# Altium PCB JacdacKeycapButtonBc30 135 panel.PcbDoc
Units mm, origin at the board's own origin, x right, y up, seen from the top; angles counter-clockwise.
Board outline 70 x 74 mm, 2 copper layers (Top Layer, Bottom Layer), stack 1.525 mm thick; 4 components, 10 nets, 4 pads, 0 vias.
Unrouted connection lines stored in the file: 10.
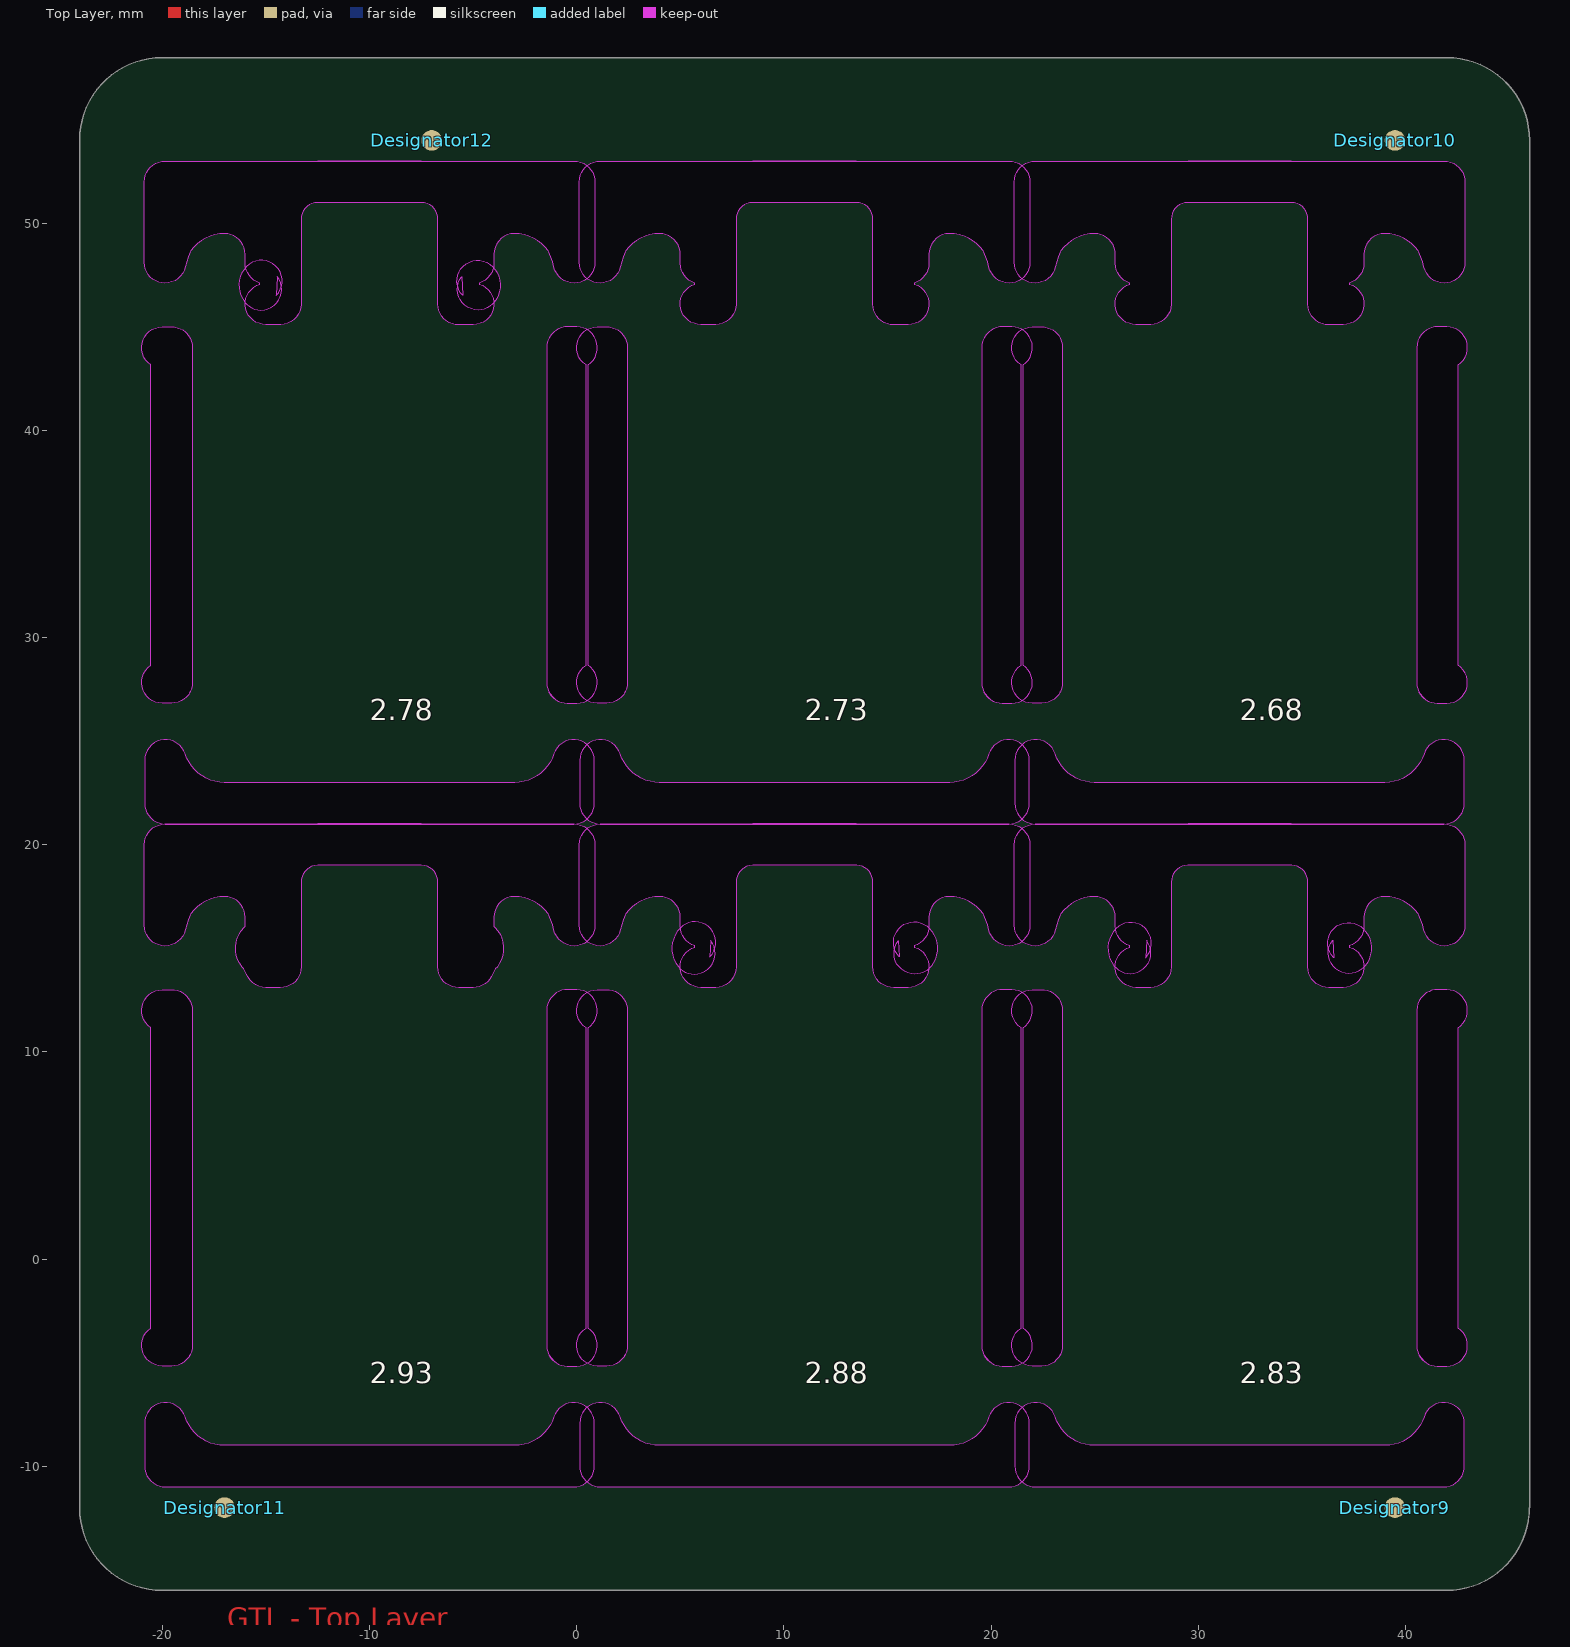
[diagram p0: Top Layer view]
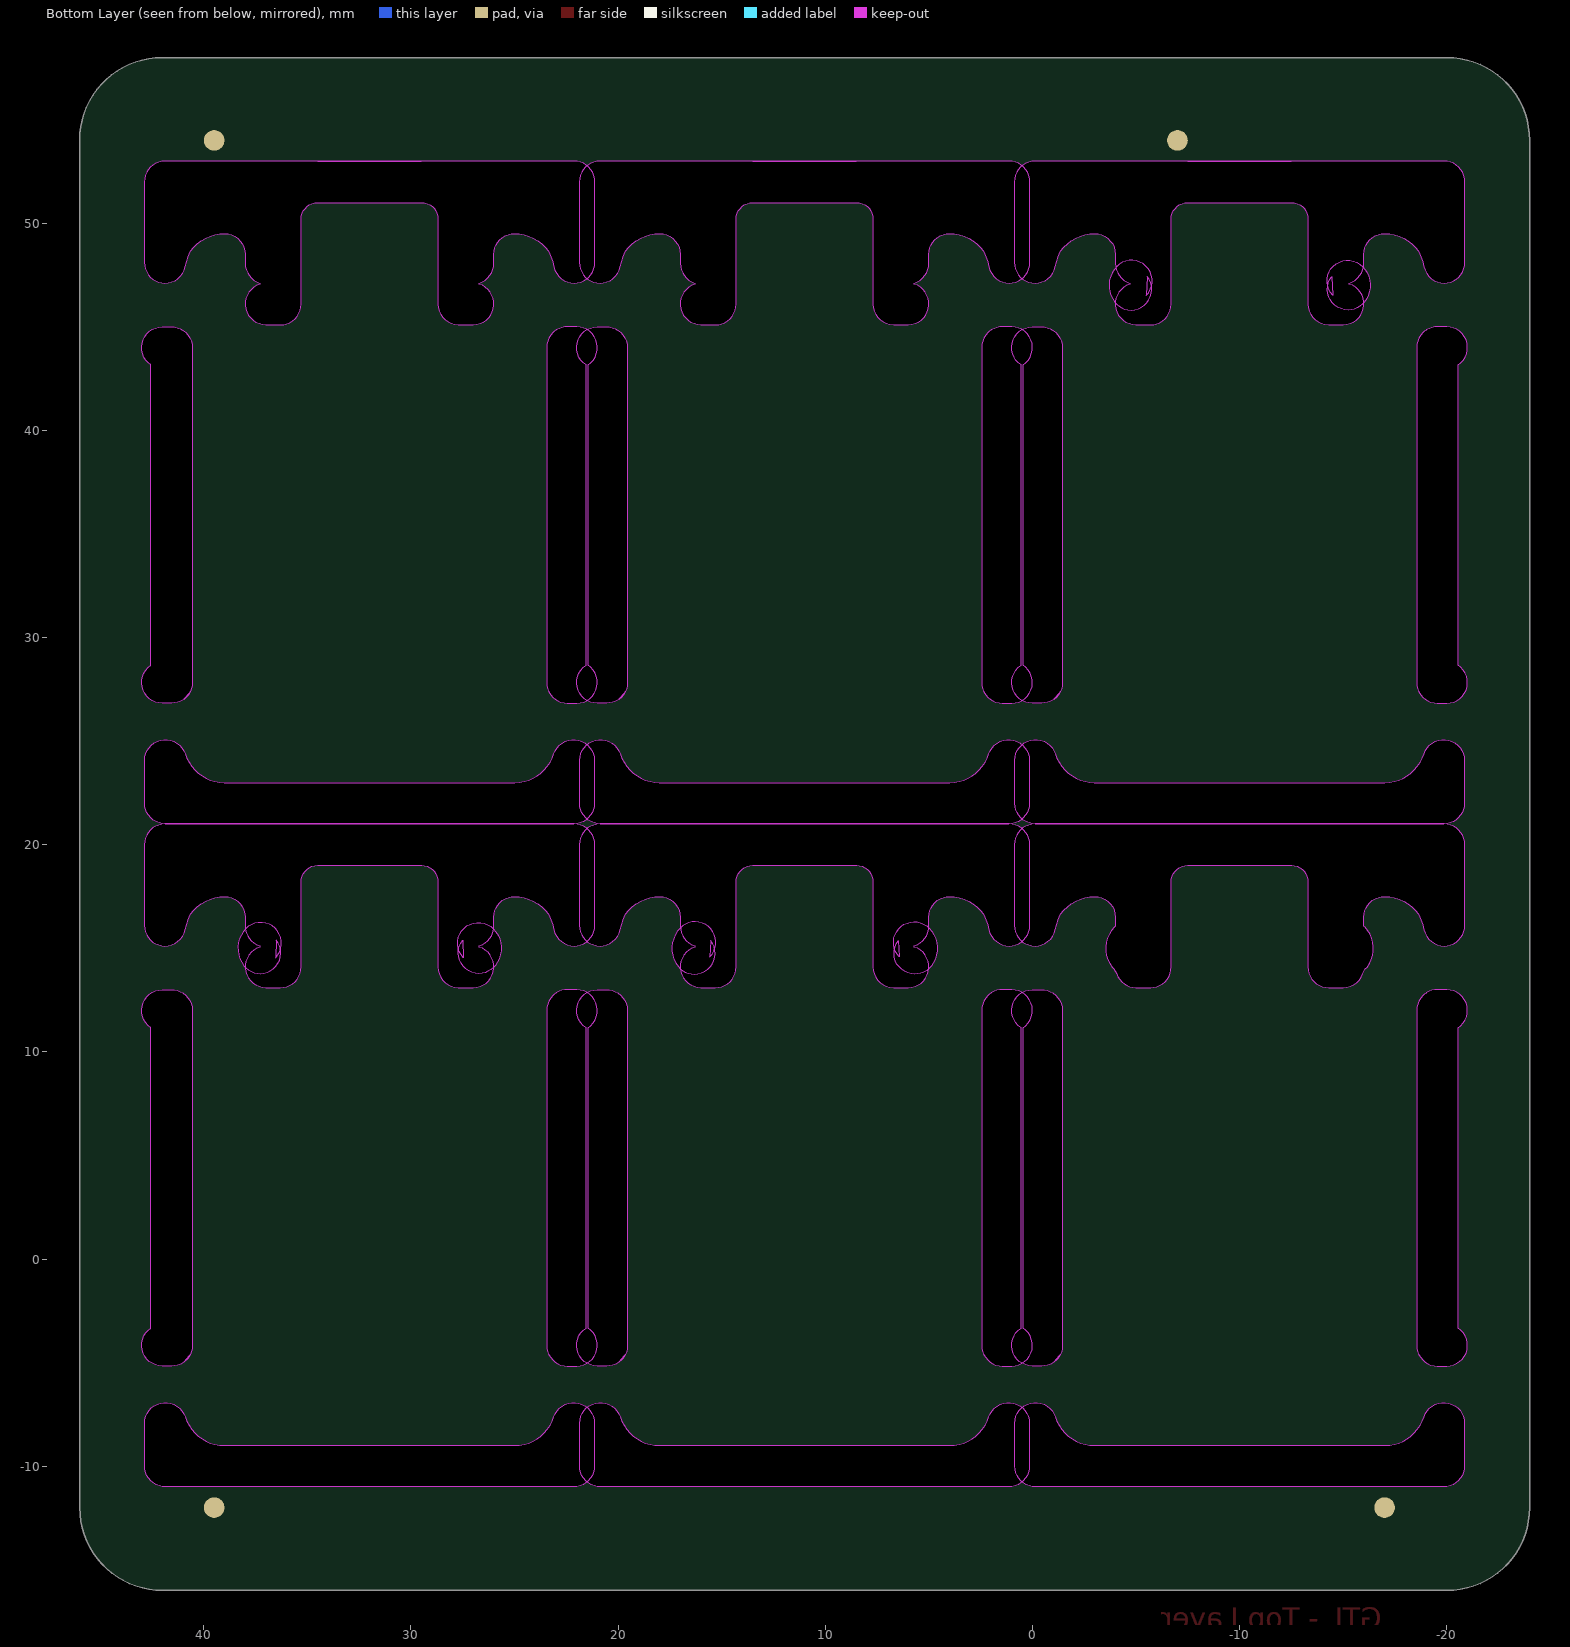
[diagram p1: Bottom Layer view, seen from below]

## Layer stack, top to bottom
Top Solder: solder mask 0.0102, Solder Resist, Dk 3.5
Top Layer: signal copper 0.0356
Dielectric 1: core 1.454, FR-4, Dk 4.2
Bottom Layer: signal copper 0.0356
Bottom Solder: solder mask 0.0102, Solder Resist, Dk 3.5

## Board outline
-24,-12 -24,54 cw(c-20,54) -20,58 42,58 cw(c42,54) 46,54 46,-12 45.984,-12 cw(c41.984,-12) 41.984,-16 -20,-16 cw(c-20,-12)
cut-out: -15.94,47.906 ccw(c-15,47) -16.028,46.195 ccw(c-15.24,46.812) -15.24,45.812 ccw(c-15.24,46.812) -14.453,47.429 -14.499,46.518 ccw(c-15.22,47.212)
cut-out: -4.06,47.906 cw(c-5,47) -3.972,46.195 cw(c-4.76,46.812) -4.76,45.812 cw(c-4.76,46.812) -5.547,47.429 -5.501,46.518 cw(c-4.78,47.212)
cut-out: 26.024,15.94 ccw(c27,15) 25.933,14.164 ccw(c26.721,14.781) 26.721,13.781 ccw(c26.721,14.781) 27.508,15.398 27.465,14.552 ccw(c26.744,15.246)
cut-out: 37.976,15.94 cw(c37,15) 38.067,14.164 cw(c37.279,14.781) 37.279,13.781 cw(c37.279,14.781) 36.492,15.398 36.535,14.552 cw(c37.256,15.246)
cut-out: 4.988,15.975 ccw(c6,15) 4.894,14.133 ccw(c5.681,14.75) 5.681,13.75 ccw(c5.681,14.75) 6.469,15.367 6.429,14.587 ccw(c5.708,15.281)
cut-out: 17.012,15.975 cw(c16,15) 17.106,14.133 cw(c16.319,14.75) 16.319,13.75 cw(c16.319,14.75) 15.531,15.367 15.571,14.587 cw(c16.292,15.281)
cut-out: 22.125,53 29.49,53 29.5,53 34.5,53 29.51,53 41.875,53 cw(c41.875,52) 42.875,52 42.875,48.111 cw(c41.875,48.111) 41.875,47.111 cw(c41.875,48.111) 40.899,47.891 ccw(c37.001,47) 40.654,48.627 40.626,48.663 ccw(c39,47.5) 39,49.5 ccw(c39,48.5) 38,48.5 38,48.069 cw(c37,48.069) 37.3,47.115 37.3,47.061 cw(c37.002,46.107) 37.007,45.106 36.892,45.1 36.301,45.099 36.3,45.099 cw(c36.3,46.1) 35.3,46.1 35.3,50.2 ccw(c34.5,50.2) 34.507,51 29.491,51 ccw(c29.5,50.2) 28.7,50.203 28.7,50.198 28.7,46.1 cw(c27.7,46.1) 27.706,45.1 27.622,45.097 27.072,45.102 26.993,45.106 cw(c26.998,46.107) 26.7,47.062 26.7,47.115 cw(c27,48.069) 26,48.069 26,48.5 ccw(c25,48.5) 25,49.5 ccw(c25,47.5) 23.374,48.663 23.345,48.625 ccw(c27,47) 23.101,47.891 cw(c22.125,48.111) 22.125,47.111 cw(c22.125,48.111) 21.125,48.111 21.125,52 cw(c22.125,52)
cut-out: 1.125,53 8.49,53 8.5,53 13.5,53 8.51,53 20.875,53 cw(c20.875,52) 21.875,52 21.875,48.111 cw(c20.875,48.111) 20.875,47.111 cw(c20.875,48.111) 19.899,47.891 ccw(c16.001,47) 19.654,48.627 19.626,48.663 ccw(c18,47.5) 18,49.5 ccw(c18,48.5) 17,48.5 17,48.069 cw(c16,48.069) 16.3,47.115 16.3,47.061 cw(c16.002,46.107) 16.007,45.106 15.892,45.1 15.301,45.099 15.3,45.099 cw(c15.3,46.1) 14.3,46.1 14.3,50.2 ccw(c13.5,50.2) 13.507,51 8.491,51 ccw(c8.5,50.2) 7.7,50.203 7.7,50.198 7.7,46.1 cw(c6.7,46.1) 6.706,45.1 6.622,45.097 6.072,45.102 5.993,45.106 cw(c5.998,46.107) 5.7,47.062 5.7,47.115 cw(c6,48.069) 5,48.069 5,48.5 ccw(c4,48.5) 4,49.5 ccw(c4,47.5) 2.374,48.663 2.345,48.625 ccw(c6,47) 2.101,47.891 cw(c1.125,48.111) 1.125,47.111 cw(c1.125,48.111) 0.125,48.111 0.125,52 cw(c1.125,52)
cut-out: -19.875,53 -12.51,53 -12.5,53 -7.5,53 -12.49,53 -0.125,53 cw(c-0.125,52) 0.875,52 0.875,48.111 cw(c-0.125,48.111) -0.125,47.111 cw(c-0.125,48.111) -1.101,47.891 ccw(c-4.999,47) -1.346,48.627 -1.374,48.663 ccw(c-3,47.5) -3,49.5 ccw(c-3,48.5) -4,48.5 -4,48.069 cw(c-5,48.069) -4.7,47.115 -4.7,47.061 cw(c-4.998,46.107) -4.993,45.106 -5.108,45.1 -5.699,45.099 -5.7,45.099 cw(c-5.7,46.1) -6.7,46.1 -6.7,50.2 ccw(c-7.5,50.2) -7.493,51 -12.509,51 ccw(c-12.5,50.2) -13.3,50.203 -13.3,50.198 -13.3,46.1 cw(c-14.3,46.1) -14.294,45.1 -14.378,45.097 -14.928,45.102 -15.007,45.106 cw(c-15.002,46.107) -15.3,47.062 -15.3,47.115 cw(c-15,48.069) -16,48.069 -16,48.5 ccw(c-17,48.5) -17,49.5 ccw(c-17,47.5) -18.626,48.663 -18.655,48.625 ccw(c-15,47) -18.899,47.891 cw(c-19.875,48.111) -19.875,47.111 cw(c-19.875,48.111) -20.875,48.111 -20.875,52 cw(c-19.875,52)
cut-out: 22.125,21 29.49,21 29.5,21 34.5,21 29.51,21 41.875,21 cw(c41.875,20) 42.875,20 42.875,16.111 cw(c41.875,16.111) 41.875,15.111 cw(c41.875,16.111) 40.899,15.891 ccw(c37.001,15) 40.654,16.627 40.626,16.663 ccw(c39,15.5) 39,17.5 ccw(c39,16.5) 38,16.5 38,16.069 cw(c37,16.069) 37.3,15.115 37.3,15.061 cw(c37.002,14.107) 37.007,13.106 36.892,13.1 36.301,13.099 36.3,13.099 cw(c36.3,14.1) 35.3,14.1 35.3,18.2 ccw(c34.5,18.2) 34.507,19 29.491,19 ccw(c29.5,18.2) 28.7,18.203 28.7,18.198 28.7,14.1 cw(c27.7,14.1) 27.706,13.1 27.622,13.097 27.072,13.102 26.993,13.106 cw(c26.998,14.107) 26.7,15.062 26.7,15.115 cw(c27,16.069) 26,16.069 26,16.5 ccw(c25,16.5) 25,17.5 ccw(c25,15.5) 23.374,16.663 23.345,16.625 ccw(c27,15) 23.101,15.891 cw(c22.125,16.111) 22.125,15.111 cw(c22.125,16.111) 21.125,16.111 21.125,20 cw(c22.125,20)
cut-out: 1.125,21 8.49,21 8.5,21 13.5,21 8.51,21 20.875,21 cw(c20.875,20) 21.875,20 21.875,16.111 cw(c20.875,16.111) 20.875,15.111 cw(c20.875,16.111) 19.899,15.891 ccw(c16.001,15) 19.654,16.627 19.626,16.663 ccw(c18,15.5) 18,17.5 ccw(c18,16.5) 17,16.5 17,16.069 cw(c16,16.069) 16.3,15.115 16.3,15.061 cw(c16.002,14.107) 16.007,13.106 15.892,13.1 15.301,13.099 15.3,13.099 cw(c15.3,14.1) 14.3,14.1 14.3,18.2 ccw(c13.5,18.2) 13.507,19 8.491,19 ccw(c8.5,18.2) 7.7,18.203 7.7,18.198 7.7,14.1 cw(c6.7,14.1) 6.706,13.1 6.622,13.097 6.072,13.102 5.993,13.106 cw(c5.998,14.107) 5.7,15.062 5.7,15.115 cw(c6,16.069) 5,16.069 5,16.5 ccw(c4,16.5) 4,17.5 ccw(c4,15.5) 2.374,16.663 2.345,16.625 ccw(c6,15) 2.101,15.891 cw(c1.125,16.111) 1.125,15.111 cw(c1.125,16.111) 0.125,16.111 0.125,20 cw(c1.125,20)
cut-out: -19.999,45.001 -19.573,45 cw(c-19.55,44) -19.019,44.848 -18.999,44.835 cw(c-19.55,44) -18.843,44.707 cw(c-19.55,44) -18.55,44 -18.55,43.998 -18.55,27.832 -18.55,27.83 cw(c-19.55,27.83) -18.669,27.356 -18.655,27.383 cw(c-19.55,27.83) -19.55,26.83 -19.551,26.83 -20.001,26.83 cw(c-20,27.83) -20.55,28.666 -20.55,43.165 cw(c-20,44)
cut-out: -0.986,44.844 ccw(c-0.435,43.992) -1.45,44 -1.45,27.835 -1.45,27.83 ccw(c-0.45,27.83) -1.064,27.04 -1.324,27.344 ccw(c-0.45,27.83) -0.45,26.83 -0.444,26.83 -0.001,26.829 0,26.829 ccw(c0,27.83) 0.55,28.665 0.55,43.164 ccw(c0,44) 0.001,45 -0.426,45 ccw(c-0.45,44)
cut-out: -18.902,24.382 ccw(c-19.853,24.073) -20.854,24.073 -20.854,22 ccw(c-19.853,22) -19.853,21 -17,21 -3,21 -0.147,21 ccw(c-0.147,22) 0.854,22 0.854,24.073 ccw(c-0.147,24.073) -1.098,24.382 cw(c-3,25) -2.989,23 -3,23 -17,23 -17.01,23 cw(c-17,25)
cut-out: -19.875,21 -12.51,21 -12.5,21 -7.5,21 -12.49,21 -0.125,21 cw(c-0.125,20) 0.875,20 0.875,16.111 cw(c-0.125,16.111) -0.125,15.111 cw(c-0.125,16.111) -1.101,15.891 ccw(c-4.999,15) -1.346,16.627 -1.374,16.663 ccw(c-3,15.5) -3,17.5 ccw(c-3,16.5) -4,16.5 -4,16.07 -3.945,16.017 cw(c-5,15) -3.846,14.096 -3.923,14.009 -4.058,13.763 -4.06,13.76 cw(c-4.998,14.107) -4.551,13.212 cw(c-4.998,14.107) -4.993,13.106 -5.108,13.1 -5.699,13.099 -5.7,13.099 cw(c-5.7,14.1) -6.7,14.102 -6.7,18.2 ccw(c-7.5,18.2) -7.493,19 -12.509,19 ccw(c-12.5,18.2) -13.3,18.206 -13.3,18.198 -13.3,14.105 -13.3,14.1 cw(c-14.3,14.1) -14.3,13.099 -14.38,13.097 -14.928,13.102 -15.007,13.106 cw(c-15.002,14.107) -15.94,13.76 -16.077,14.01 -16.154,14.096 cw(c-15,15) -16.055,16.017 -16,16.07 -16,16.5 ccw(c-17,16.5) -17,17.5 ccw(c-17,15.5) -18.626,16.663 -18.655,16.625 ccw(c-15,15) -18.899,15.891 cw(c-19.875,16.111) -19.875,15.111 cw(c-19.875,16.111) -20.875,16.111 -20.875,20 cw(c-19.875,20)
cut-out: -19.999,13.001 -19.573,13 cw(c-19.55,12) -19.019,12.848 -18.999,12.835 cw(c-19.55,12) -18.843,12.707 cw(c-19.55,12) -18.55,12 -18.55,11.998 -18.55,-4.168 -18.55,-4.17 cw(c-19.55,-4.17) -18.669,-4.644 -18.655,-4.617 cw(c-19.55,-4.17) -19.55,-5.17 -19.551,-5.17 -20.001,-5.17 cw(c-20,-4.17) -20.55,-3.334 -20.55,11.165 cw(c-20,12)
cut-out: -0.986,12.844 ccw(c-0.435,11.992) -1.45,12 -1.45,-4.165 -1.45,-4.17 ccw(c-0.45,-4.17) -1.064,-4.96 -1.324,-4.656 ccw(c-0.45,-4.17) -0.45,-5.17 -0.444,-5.17 -0.001,-5.171 0,-5.171 ccw(c0,-4.17) 0.55,-3.335 0.55,11.164 ccw(c0,12) 0.001,13 -0.426,13 ccw(c-0.45,12)
cut-out: -18.902,-7.618 ccw(c-19.853,-7.927) -20.854,-7.927 -20.854,-10 ccw(c-19.853,-10) -19.853,-11 -17,-11 -3,-11 -0.147,-11 ccw(c-0.147,-10) 0.854,-10 0.854,-7.927 ccw(c-0.147,-7.927) -1.098,-7.618 cw(c-3,-7) -2.989,-9 -3,-9 -17,-9 -17.01,-9 cw(c-17,-7)
cut-out: 1.001,13.001 1.427,13 cw(c1.45,12) 1.981,12.848 2.001,12.835 cw(c1.45,12) 2.157,12.707 cw(c1.45,12) 2.45,12 2.45,11.998 2.45,-4.168 2.45,-4.17 cw(c1.45,-4.17) 2.331,-4.644 2.345,-4.617 cw(c1.45,-4.17) 1.45,-5.17 1.449,-5.17 0.999,-5.17 cw(c1,-4.17) 0.45,-3.334 0.45,11.165 cw(c1,12)
cut-out: 20.014,12.844 ccw(c20.565,11.992) 19.55,12 19.55,-4.165 19.55,-4.17 ccw(c20.55,-4.17) 19.936,-4.96 19.676,-4.656 ccw(c20.55,-4.17) 20.55,-5.17 20.556,-5.17 20.999,-5.171 21,-5.171 ccw(c21,-4.17) 21.55,-3.335 21.55,11.164 ccw(c21,12) 21.001,13 20.574,13 ccw(c20.55,12)
cut-out: 2.098,-7.618 ccw(c1.147,-7.927) 0.146,-7.927 0.146,-10 ccw(c1.147,-10) 1.147,-11 4,-11 18,-11 20.853,-11 ccw(c20.853,-10) 21.854,-10 21.854,-7.927 ccw(c20.853,-7.927) 19.902,-7.618 cw(c18,-7) 18.011,-9 18,-9 4,-9 3.99,-9 cw(c4,-7)
cut-out: 22.001,13.001 22.427,13 cw(c22.45,12) 22.981,12.848 23.001,12.835 cw(c22.45,12) 23.157,12.707 cw(c22.45,12) 23.45,12 23.45,11.998 23.45,-4.168 23.45,-4.17 cw(c22.45,-4.17) 23.331,-4.644 23.345,-4.617 cw(c22.45,-4.17) 22.45,-5.17 22.449,-5.17 21.999,-5.17 cw(c22,-4.17) 21.45,-3.334 21.45,11.165 cw(c22,12)
cut-out: 41.014,12.844 ccw(c41.565,11.992) 40.55,12 40.55,-4.165 40.55,-4.17 ccw(c41.55,-4.17) 40.936,-4.96 40.676,-4.656 ccw(c41.55,-4.17) 41.55,-5.17 41.556,-5.17 41.999,-5.171 42,-5.171 ccw(c42,-4.17) 42.55,-3.335 42.55,11.164 ccw(c42,12) 42.001,13 41.574,13 ccw(c41.55,12)
cut-out: 23.098,-7.618 ccw(c22.147,-7.927) 21.146,-7.927 21.146,-10 ccw(c22.147,-10) 22.147,-11 25,-11 39,-11 41.853,-11 ccw(c41.853,-10) 42.854,-10 42.854,-7.927 ccw(c41.853,-7.927) 40.902,-7.618 cw(c39,-7) 39.011,-9 39,-9 25,-9 24.99,-9 cw(c25,-7)
cut-out: 22.001,45.001 22.427,45 cw(c22.45,44) 22.981,44.848 23.001,44.835 cw(c22.45,44) 23.157,44.707 cw(c22.45,44) 23.45,44 23.45,43.998 23.45,27.832 23.45,27.83 cw(c22.45,27.83) 23.331,27.356 23.345,27.383 cw(c22.45,27.83) 22.45,26.83 22.449,26.83 21.999,26.83 cw(c22,27.83) 21.45,28.666 21.45,43.165 cw(c22,44)
cut-out: 41.014,44.844 ccw(c41.565,43.992) 40.55,44 40.55,27.835 40.55,27.83 ccw(c41.55,27.83) 40.936,27.04 40.676,27.344 ccw(c41.55,27.83) 41.55,26.83 41.556,26.83 41.999,26.829 42,26.829 ccw(c42,27.83) 42.55,28.665 42.55,43.164 ccw(c42,44) 42.001,45 41.574,45 ccw(c41.55,44)
cut-out: 23.098,24.382 ccw(c22.147,24.073) 21.146,24.073 21.146,22 ccw(c22.147,22) 22.147,21 25,21 39,21 41.853,21 ccw(c41.853,22) 42.854,22 42.854,24.073 ccw(c41.853,24.073) 40.902,24.382 cw(c39,25) 39.011,23 39,23 25,23 24.99,23 cw(c25,25)
cut-out: 1.001,45.001 1.427,45 cw(c1.45,44) 1.981,44.848 2.001,44.835 cw(c1.45,44) 2.157,44.707 cw(c1.45,44) 2.45,44 2.45,43.998 2.45,27.832 2.45,27.83 cw(c1.45,27.83) 2.331,27.356 2.345,27.383 cw(c1.45,27.83) 1.45,26.83 1.449,26.83 0.999,26.83 cw(c1,27.83) 0.45,28.666 0.45,43.165 cw(c1,44)
cut-out: 20.014,44.844 ccw(c20.565,43.992) 19.55,44 19.55,27.835 19.55,27.83 ccw(c20.55,27.83) 19.936,27.04 19.676,27.344 ccw(c20.55,27.83) 20.55,26.83 20.556,26.83 20.999,26.829 21,26.829 ccw(c21,27.83) 21.55,28.665 21.55,43.164 ccw(c21,44) 21.001,45 20.574,45 ccw(c20.55,44)
cut-out: 2.098,24.382 ccw(c1.147,24.073) 0.146,24.073 0.146,22 ccw(c1.147,22) 1.147,21 4,21 18,21 20.853,21 ccw(c20.853,22) 21.854,22 21.854,24.073 ccw(c20.853,24.073) 19.902,24.382 cw(c18,25) 18.011,23 18,23 4,23 3.99,23 cw(c4,25)

## Design rules (kind name [scope] priority, off if disabled: settings)
AssemblyTestPointUsage [All] p1: valid=2
BoardOutlineClearance [Not (OnLayer('Component Keepout'))] p1: gap=0.3 ignorepadtopadclearanceinfootprint=FALSE except(0: Arc-SplitContinuation Track-SplitContinuation SMDPad-SplitContinuation THPad-SplitContinuation Via-SplitContinuation Fill-SplitContinuation Poly-SplitContinuation Region-OutlineEdge Region-SplitContinuation Text-OutlineEdge Text-SplitContinuation; 0.2: Track-OutlineEdge Fill-CavityEdge Fill-CutoutEdge Fill-SplitBarrior Poly-CavityEdge Poly-CutoutEdge Poly-SplitBarrior Text-CavityEdge Text-CutoutEdge Text-SplitBarrior; 0.25: SMDPad-OutlineEdge)
Clearance [All] p1: gap=0.125 ignorepadtopadclearanceinfootprint=FALSE except(0: Arc-Hole Track-Hole SMDPad-Hole THPad-Hole Via-Hole Fill-Hole Poly-Hole Region-Hole Text-Hole)
ComponentClearance [All] p1: gap=0.1 collisioncheckmode=3 verticalgap=0.254 showdistances=FALSE
DiffPairsRouting [All] p1: maxlimit=2 minlimit=0.15 mostfreqgap=0.15 toplayer_minwidth=0.15 toplayer_maxwidth=2 toplayer_prefwidth=0.15 bottomlayer_minwidth=0.15 bottomlayer_maxwidth=2 bottomlayer_prefwidth=0.15 substack1={CB9D278B-8BF5-444A-AAF4-837A2A9DF42D} toplayer_{cb9d278b-8bf5-444a-aaf4-837a2a9df42d}_minwidth=0.381 toplayer_{cb9d278b-8bf5-444a-aaf4-837a2a9df42d}_maxwidth=0.381 toplayer_{cb9d278b-8bf5-444a-aaf4-837a2a9df42d}_prefwidth=0.381 bottomlayer_{cb9d278b-8bf5-444a-aaf4-837a2a9df42d}_minwidth=0.381 bottomlayer_{cb9d278b-8bf5-444a-aaf4-837a2a9df42d}_maxwidth=0.381 bottomlayer_{cb9d278b-8bf5-444a-aaf4-837a2a9df42d}_prefwidth=0.381 substack2={826B8647-A721-4255-895A-19F9591B9CD1} toplayer_{826b8647-a721-4255-895a-19f9591b9cd1}_minwidth=0.381 toplayer_{826b8647-a721-4255-895a-19f9591b9cd1}_maxwidth=0.381 toplayer_{826b8647-a721-4255-895a-19f9591b9cd1}_prefwidth=0.381 bottomlayer_{826b8647-a721-4255-895a-19f9591b9cd1}_minwidth=0.381 bottomlayer_{826b8647-a721-4255-895a-19f9591b9cd1}_maxwidth=0.381 bottomlayer_{826b8647-a721-4255-895a-19f9591b9cd1}_prefwidth=0.381 substack3={E64FCAF4-1BC8-437D-B1E0-0E5F2DC0F59E} toplayer_{e64fcaf4-1bc8-437d-b1e0-0e5f2dc0f59e}_minwidth=0.381 toplayer_{e64fcaf4-1bc8-437d-b1e0-0e5f2dc0f59e}_maxwidth=0.381 toplayer_{e64fcaf4-1bc8-437d-b1e0-0e5f2dc0f59e}_prefwidth=0.381 bottomlayer_{e64fcaf4-1bc8-437d-b1e0-0e5f2dc0f59e}_minwidth=0.381 bottomlayer_{e64fcaf4-1bc8-437d-b1e0-0e5f2dc0f59e}_maxwidth=0.381 bottomlayer_{e64fcaf4-1bc8-437d-b1e0-0e5f2dc0f59e}_prefwidth=0.381 substack4={E61CE66C-507C-4E1E-8E83-C905434AFC1C} toplayer_{e61ce66c-507c-4e1e-8e83-c905434afc1c}_minwidth=0.381 toplayer_{e61ce66c-507c-4e1e-8e83-c905434afc1c}_maxwidth=0.381 toplayer_{e61ce66c-507c-4e1e-8e83-c905434afc1c}_prefwidth=0.381 bottomlayer_{e61ce66c-507c-4e1e-8e83-c905434afc1c}_minwidth=0.381 bottomlayer_{e61ce66c-507c-4e1e-8e83-c905434afc1c}_maxwidth=0.381 bottomlayer_{e61ce66c-507c-4e1e-8e83-c905434afc1c}_prefwidth=0.381 maxuncoupledlength=25
FabricationTestPointUsage [All] p1: valid=2 allowmultiple=FALSE
HoleSize [All] p1: absolutevalues=TRUE maxlimit=3.1 minlimit=0.2 maxpercent=80.000 minpercent=20.000
MinimumSolderMaskSliver [All] p1: minsoldermaskwidth=0.005
PlaneClearance [All] p1: clearance=0.3
PlaneConnect [All] p1: planeconnectstyle=Relief reliefexpansion=0.5 reliefentries=4 reliefconductorwidth=0.2 reliefairgap=0.3
PolygonConnect "PolygonConnect GND" [isVIA] p1: connectstyle=Relief reliefconductorwidth=0.2 reliefentries=4 polygonreliefangle="90 Angle" airgapwidth=0.2
PolygonConnect [All] p2: connectstyle=Relief reliefconductorwidth=0.2 reliefentries=4 polygonreliefangle="90 Angle" airgapwidth=0.2
RoutingVias [All] p1: holewidth=0.3 width=0.6 viastyle="Through Hole" minholewidth=0.3 minwidth=0.6 maxholewidth=0.5 maxwidth=0.8
SilkToSilkClearance [All] p1: silktosilkclearance=0.001
SilkToSolderMaskClearance [IsPad] p1: minsilkscreentomaskgap=0.05 clearancetoexposedcopper=TRUE
SolderMaskExpansion [All] p1: expansion=0.075 istentingtop=FALSE
Width [All] p1: maxlimit=2 minlimit=0.15 preferedwidth=0.15 substack1={CB9D278B-8BF5-444A-AAF4-837A2A9DF42D} substack2={826B8647-A721-4255-895A-19F9591B9CD1} substack3={E64FCAF4-1BC8-437D-B1E0-0E5F2DC0F59E} substack4={E61CE66C-507C-4E1E-8E83-C905434AFC1C} minimp=50.000000 maximp=50.000000 favimp=50.000000
20 further rules are at their usual default settings.

## Components (designator, comment, footprint, x,y, rotation, side; value= is the part's Value field where it differs from the comment)
Designator9 "Comment" "Pad1mm soldermask2mm doublesided" 39.5,-12 r0 top
Designator10 "Comment" "Pad1mm soldermask2mm doublesided" 39.5,54 r0 top
Designator11 "Comment" "Pad1mm soldermask2mm doublesided" -17,-12 r180 top
Designator12 "Comment" "Pad1mm soldermask2mm doublesided" -7,54 r180 top

## Footprints (in the part's own frame and the unit in brackets; to place one, negate y for a bottom-side part, rotate by r counter-clockwise, add the part's x,y. Pads: shape width x height; smd on the part's side, far side on the other; paste and mask are expansions set on the pad)
"Pad1mm soldermask2mm doublesided" [mm] "Testpoint/fiducial pad 1mm diameter with 2mm diameter soldermask"
  round 1 all layers, no hole paste-1 mask+0.5: 1(0,0)

## Nets (pads, with @x,y where several pads share a name; then routed paths per layer and width w, separated by ;. In a path a pad name is that pad's centre, name@x,y a point inside that pad or via, vN(x,y) a via of type N, cw(c..) or ccw(c..) an arc to the next point about the centre after c; other vN are vias at no path point)
3V3: 
BUTTON: 
GND: 
ICPCK: 
JD_DATA: 
JD_DATA_MCU/ICPDA: 
JD_PWR: 
JD_STATUS/ICVPP: 
NetC1_2: 
NetD6_2: 
pads on no net: Designator9.1 Designator10.1 Designator11.1 Designator12.1

## Other copper
Top Layer:
  text "GTL - Top Layer" at -16.872,-18.151 h1.7
Bottom Layer:
  text "GBL - Bottom Layer" at -16.872,-19.651 h1.7

## Silkscreen, mask and mechanical layers (free items; w line width, h text height)
Top Overlay:
  text "2.78" at -10,26 h1
  text "2.73" at 11,26 h1
  text "2.68" at 32,26 h1
  text "2.93" at -10,-6 h1
  text "2.88" at 11,-6 h1
  text "2.83" at 32,-6 h1
  text "GTO - Top Overlay" at -1.372,-21.187 h1.7
Bottom Overlay:
  text "GBO - Bottom Overlay" at -1.372,-22.687 h1.7
Top Paste:
  text "GTP - Top Paste" at 12.828,-18.151 h1.7
Bottom Paste:
  text "GBP - Bottom Paste" at 12.828,-19.651 h1.7
Top Solder:
  text "GTS - Top Solder (resist)" at 12.828,-21.187 h1.7
Bottom Solder:
  text "GBS - Bottom Solder (resist)" at 12.828,-22.687 h1.7
Fabrication Notes:
  text "GTL - Top Layer" at 47.501,48.093 h1.7
  text "GBL - Bottom Layer" at 47.501,46.593 h1.7
  text "GTO - Top Overlay" at 47.501,45.057 h1.7
  text "GBO - Bottom Overlay" at 47.501,43.557 h1.7
  text "GTP - Top Paste" at 47.501,42.093 h1.7
  text "GBP - Bottom Paste" at 47.501,40.593 h1.7
  text "GTS - Top Solder (resist)" at 47.501,39.057 h1.7
  text "GBS - Bottom Solder (resist)" at 47.501,37.557 h1.7
  text "GM3 - Fabrication Notes" at 47.501,36.057 h1.7
  text "GM6 - Board Outline Only" at 47.501,34.557 h1.7
  text "GM9 - V Score" at 47.501,33.093 h1.7
  text "GM11 - Board Outline + Cutouts" at 47.501,31.557 h1.7
  text "GM15 - Top Assy" at 47.501,30.088 h1.7
  text "GM16 - Bottom Assy" at 47.501,28.588 h1.7
  text "Each circuit has: /  / 17x stamp-holes/half-holes / 2x non-plated 0.7mm slots  / (PLEASE USE 0.7mm) /  /  / Green solder resist, / ENIG finish, white silk /  / V-score lines on GM9" at 47.5,-4.521 h1.7
  text "GM3 - Fabrication Notes" at -16.872,-21.187 h1.7
Route Tool Path:
  lines w0.1: 45.984,-12 cw(c41.984,-12) 41.984,-16 -20,-16 cw(c-20,-12) -24,-12 -24,54 cw(c-20,54) -20,58 42,58 cw(c42,54) 46,54 46,-12
Top Component Center:
  text "GM6 - Board Outline Only" at -16.872,-22.686 h1.7
V Score:
  lines w0.1: -19,-16 -19,58 ; -1,-16 -1,58 ; 2,-16 2,58 ; 20,-16 20,58 ; 23,-16 23,58 ; 41,-16 41,58
  text "GM9 - V Score" at 12.828,-24.15 h1.7
Board Outline:
  lines w0.01: -16.001,16.069 ccw(c-15,15) -15.982,13.913 ccw(c-15.007,14.099) -15.007,13.106 ; -16,48.069 -16,47.965 ccw(c-15,47) -15.998,46.032 ccw(c-15.007,46.099) -15.007,45.106 ; -4.993,13.106 ccw(c-4.993,14.099) -4.018,13.913 ccw(c-5,15) -3.999,16.069 ; -4.993,45.106 ccw(c-4.993,46.099) -4.002,46.032 ccw(c-5,47) -4,47.965 -4,48.069 ; 5,16.069 5,16.036 ccw(c6,15) 5.011,13.953 ccw(c5.993,14.099) 5.993,13.106 ; 5,48.069 5,47.929 ccw(c6,47) 5.001,46.07 ccw(c5.993,46.099) 5.993,45.106 ; 16.007,13.106 ccw(c16.007,14.099) 16.989,13.953 ccw(c16,15) 17,16.036 17,16.069 ; 16.007,45.106 ccw(c16.007,46.099) 16.999,46.07 ccw(c16,47) 17,47.929 17,48.069 ; 26,16.069 26,16.001 ccw(c27,15) 26.006,13.993 ccw(c26.993,14.099) 26.993,13.106 ; 26,48.069 26,47.892 ccw(c27,47) 26,46.108 ccw(c26.993,46.099) 26.993,45.106 ; 37.007,13.106 ccw(c37.007,14.099) 37.994,13.993 ccw(c37,15) 38,16.001 38,16.069 ; 37.007,45.106 ccw(c37.007,46.099) 38,46.108 ccw(c37,47) 38,47.892 38,48.069
  lines w0.1: 45.984,-12 cw(c41.984,-12) 41.984,-16 -20,-16 cw(c-20,-12) -24,-12 -24,54 cw(c-20,54) -20,58 42,58 cw(c42,54) 46,54 46,-12
  text "GM11 - Board Outline + Cutouts" at -16.872,-24.186 h1.7
Top Assy:
  text "GM15 - Top Assy" at -1.372,-18.155 h1.7
Bottom Assy:
  text "GM16 - Bottom Assy" at -1.372,-19.655 h1.7
Board Outline Only:
  lines w0.1: 45.984,-12 cw(c41.984,-12) 41.984,-16 -20,-16 cw(c-20,-12) -24,-12 -24,54 cw(c-20,54) -20,58 42,58 cw(c42,54) 46,54 46,-12

## Panel: embedded boards
"JacdacKeycapButtonBc30 135.PcbDoc" at -19,51, 3 rows x 2 columns, spacing 21 x 32, rotation 270